# Altium PCB FilamentSupply.PcbDoc
Units mm, origin at the board's own origin, x right, y up, seen from the top; angles counter-clockwise.
Board outline 66 x 98.7 mm, 2 copper layers (Top Layer, Bottom Layer); 74 components, 46 nets, 190 pads, 37 vias.
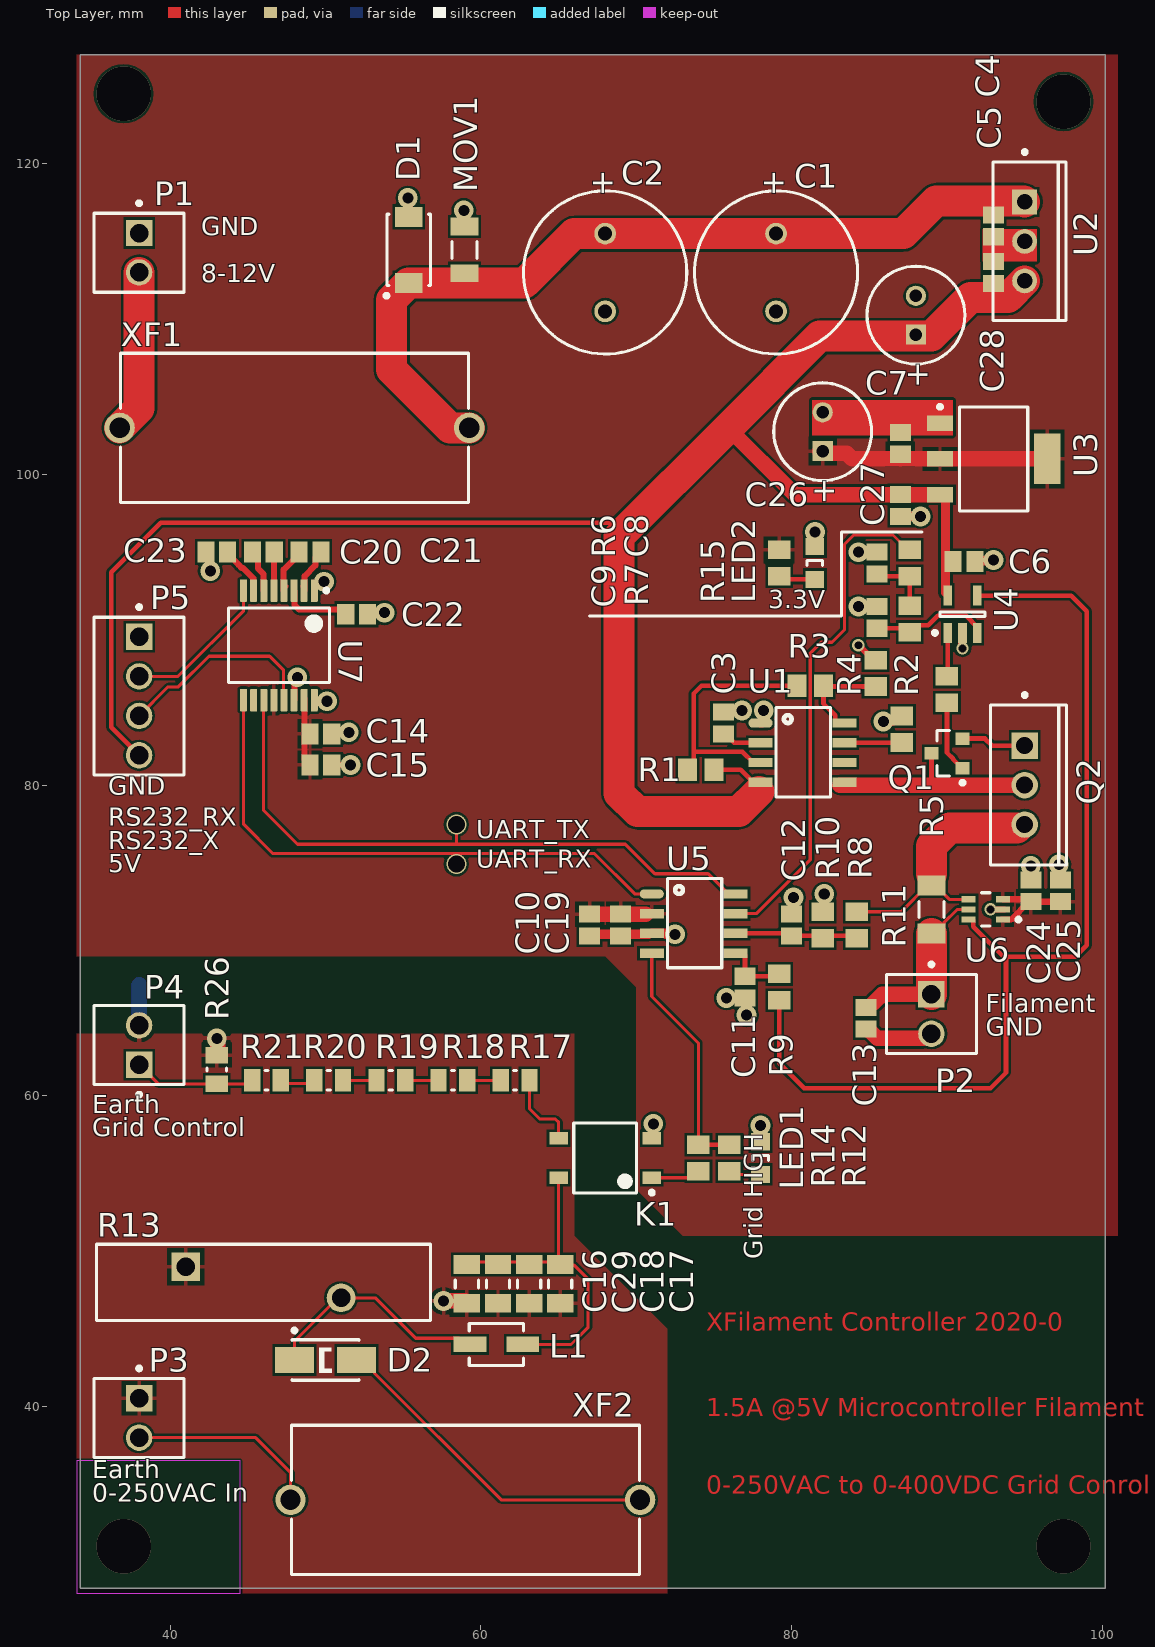
[diagram p0: Top Layer view]
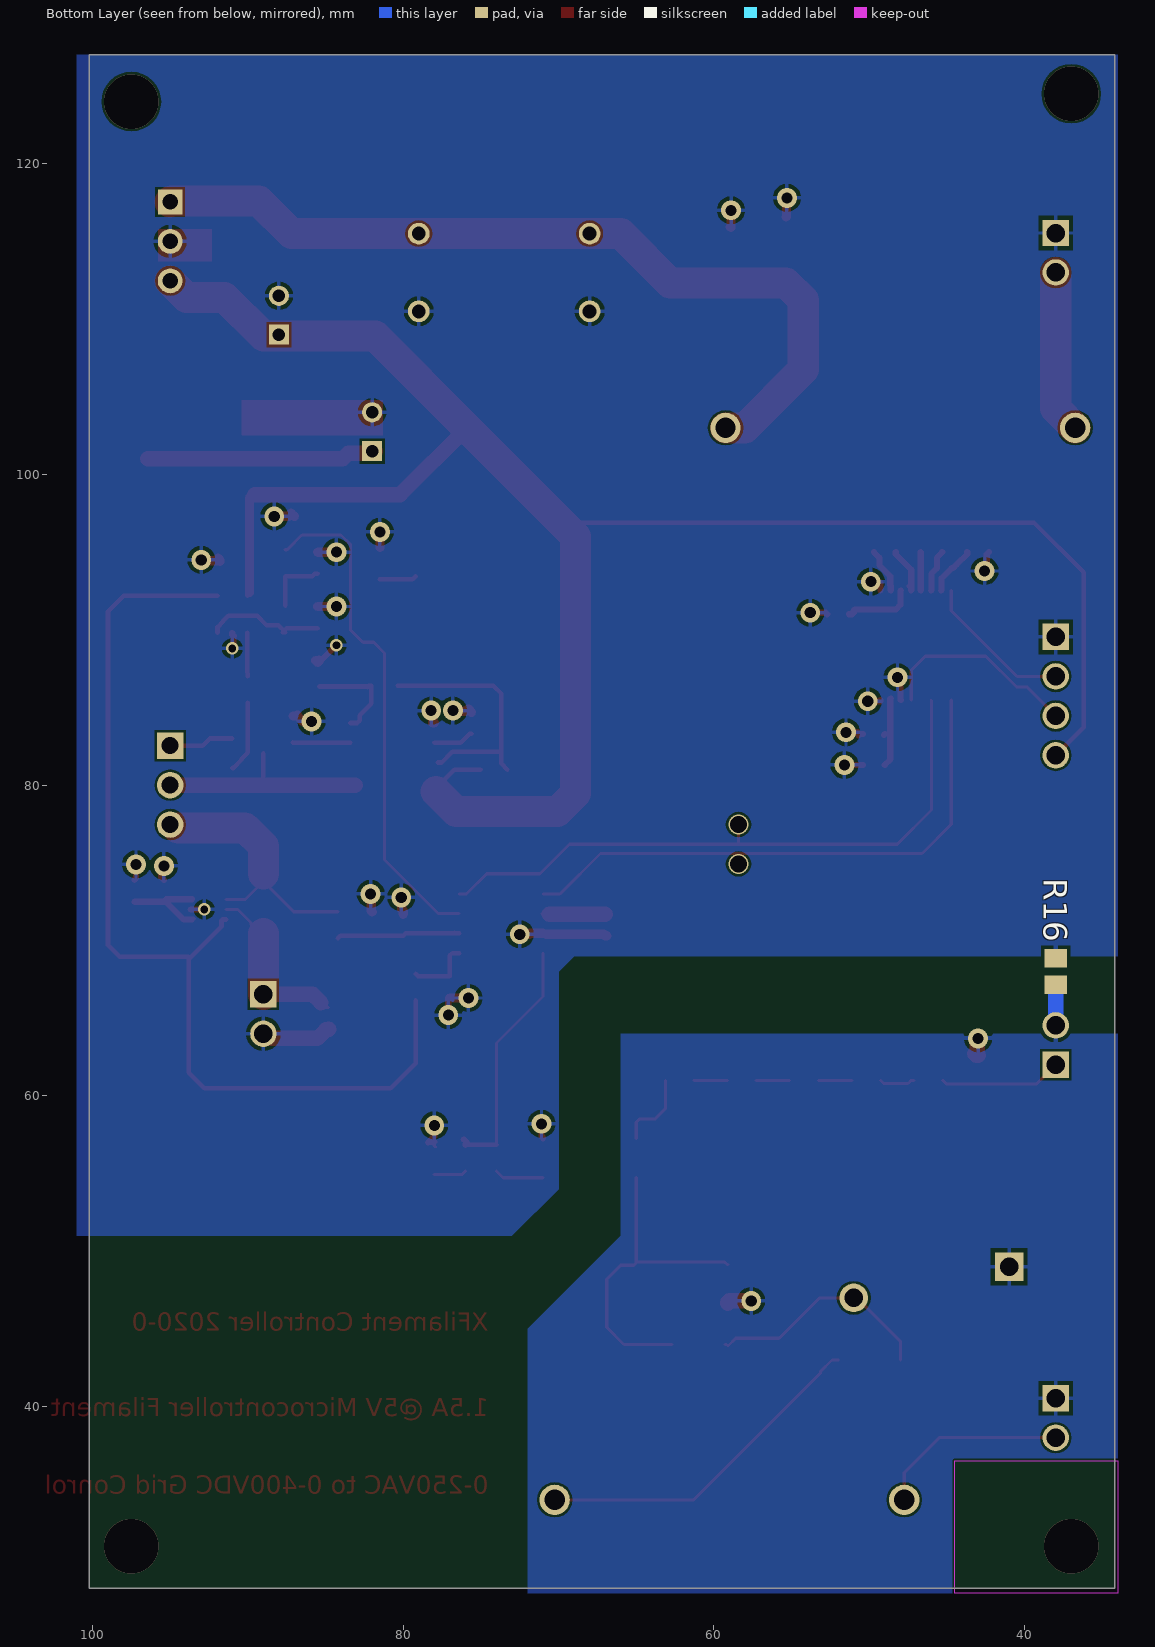
[diagram p1: Bottom Layer view, seen from below]

## Layer stack, top to bottom
Top Solder: solder mask 0.0102, Solder Resist, Dk 3.5
Top Layer: signal copper 0.0356
Dielectric 1: dielectric 0.32, FR-4, Dk 4.8
Bottom Layer: signal copper 0.0356
Bottom Solder: solder mask 0.0102, Solder Resist, Dk 3.5

## Board outline
34.2,28.3 100.2,28.3 100.2,127 34.2,127

## Design rules (kind name [scope] priority, off if disabled: settings)
Clearance [All] p1: gap=0.15 ignorepadtopadclearanceinfootprint=FALSE
PolygonConnect [All] p1: connectstyle=Relief reliefconductorwidth=0.254 reliefentries=4 polygonreliefangle="90 Angle" airgapwidth=0.254
RoutingVias [All] p1: holewidth=0.5 width=0.8 viastyle="Through Hole" minholewidth=0.3 minwidth=0.5 maxholewidth=10 maxwidth=20
SolderMaskExpansion [All] p1: expansion=0.102 istentingtop=FALSE
Width [All] p1: maxlimit=5 minlimit=0.15 preferedwidth=0.3
30 further rules are at their usual default settings.

## Components (designator, comment, footprint, x,y, rotation, side; value= is the part's Value field where it differs from the comment)
C1 "470uF 50V" PNSC-CAP-10x20-P2 79,113 r270 top
C2 "470uF 50V" PNSC-CAP-10x20-P2 68,113 r270 top
C3 "1uF" CAPC2013X145X50LL20T25 75.6,84 r270 top
C4 "0.1uF" CAPC2013X145X50LL20T25 93,116 r90 top
C5 "0.1uF" CAPC2013X145X50LL20T25 93,113 r270 top
C6 "0.1uF" CAPC2013X145X50LL20T25 91.1,94.4 r180 top
C7 "100uF 16V" CAPPR55-250-1120X630X1220 88,110.25 r90 top
C8 "1uF" CAPC2013X145X50LL20T25 85.5,94.3 r270 top
C9 "1uF" CAPC2013X145X50LL20T25 85.5,90.8 r270 top
C10 "10nF" CAPC2013X145X50LL20T25 67,71 r90 top
C11 "1uF" CAPC2013X145X50LL20T25 77,67 r90 top
C12 "1uF" CAPC2013X145X50LL20T25 80,71 r270 top
C13 "1uF" CAPC2013X145X50LL20T25 84.8,65 r90 top
C14 "0.1uF" CAPC2013X145X50LL20T25 49.7,83.3 r180 top
C15 "10nF" CAPC2013X145X50LL20T25 49.7,81.3 r180 top
C16 "20uF 50V X7R" CAPC3216X180X50LL20T30 59.1,47.9 r90 top
C17 "20uF 50V X7R" CAPC3216X180X50LL20T30 65.1,47.9 r90 top
C18 "20uF 50V X7R" CAPC3216X180X50LL20T30 63.1,47.9 r90 top
C19 "0.1uF" CAPC2013X145X50LL20T25 69,71 r90 top
C20 "0.1uF" CAPC2013X145X50LL20T25 46,95 r0 top
C21 "0.1uF" CAPC2013X145X50LL20T25 49,95 r0 top
C22 "0.1uF" CAPC2013X145X50LL20T25 52,91 r0 top
C23 "0.1uF" CAPC2013X145X50LL20T25 43,95 r0 top
C24 "0.1uF" CAPC2013X145X50LL20T25 95.4,73.2 r270 top
C25 "10nF" CAPC2013X145X50LL20T25 97.3,73.2 r270 top
C26 "100uF 16V" CAPPR55-250-1120X630X1220 82,102.75 r90 top
C27 "0.1uF" CAPC2013X145X50LL20T25 87,98 r90 top
C28 "0.1uF" CAPC2013X145X50LL20T25 87,102 r270 top
C29 "20uF 50V X7R" CAPC3216X180X50LL20T30 61.1,47.9 r90 top
D1 "P12 -- MBRAF360T3G" ONSC-SMA-FL-2-403AA-01_V 55.35,114.45 r90 top
D2 "S1M-13-F" DIOD-S1M-13-F-SMA-2_V 50,43 r180 top
K1 "ASSR-4118-503E" FP-SO-4-MFG 68,56 r180 top value=0.4pF
L1 "LQH32CN100K23L" FP-LQH32CN100K23L-MFG 61,44 r0 top value=10uH
LED1 "LED" 0805_A 78,56 r270 top
LED2 "LED" 0805_A 81.5,94.3 r270 top
MOV1 "MOV" CAPC1206(3216)100_N 58.95,114.45 r270 top value=100pF
P1 "22-27-2021" MOLX-22-27-2021_V 38,114.27 r270 top
P2 "22-27-2021" MOLX-22-27-2021_V 89,65.27 r270 top
P3 "22-27-2021" MOLX-22-27-2021_V 38,39.27 r270 top
P4 "22-27-2021" MOLX-22-27-2021_V 38,63.27 r90 top
P5 "22-27-2041" MOLX-22-27-2041_V 38,85.73 r90 top
Q1 "BC817-16LT1G" ONSC-SOT-23-3-318-08_V 90,82.05 r180 top
Q2 "BD243CG" ONSC-TO-220-3-221A-09 95,80 r0 top
R1 "30k" RESC2013X60X40NL20T25 74.15,81 r180 top
R2 "30k" RESC2013X60X40NL20T25 87.1,83.6 r90 top
R3 "30k" RESC2013X60X40NL20T25 81.2,86.4 r0 top
R4 "30k" RESC2013X60X40NL20T25 85.4,87.2 r90 top
R5 "100" RESC2013X60X40NL20T25 90,86.15 r90 top
R6 "30k" RESC2013X60X40NL20T25 87.6,94.3 r90 top
R7 "30k" RESC2013X60X40NL20T25 87.6,90.7 r90 top
R8 "30k" RESC2013X60X40NL20T25 84.2,71 r90 top
R9 "30k" RESC2013X60X40NL20T25 79.2,67 r270 top
R10 "30k" RESC2013X60X40NL20T25 82,71 r270 top
R11 "0.05R 35ppm" RESC3216X60X45ML10T20 89,72 r90 top
R12 "100" RESC2013X60X40NL20T25 74,56 r270 top
R13 "430V MOV" FP-B72220S0-MFG 46,48 r0 top value=9350pF
R14 "100" RESC2013X60X40NL20T25 76,56 r270 top
R15 "100" RESC2013X60X40NL20T25 79.2,94.3 r270 top
R16 "0" RESC2013X60X40NL20T25 38,68 r270 bottom
R17 "100k" RESC2013X50X30NL20T20 62.2,61 r180 top
R18 "100k" RESC2013X50X30NL20T20 58.2,61 r180 top
R19 "100k" RESC2013X50X30NL20T20 54.2,61 r180 top
R20 "100k" RESC2013X50X30NL20T20 50.2,61 r180 top
R21 "100k" RESC2013X50X30NL20T20 46.2,61 r180 top
R26 "4.7M" RESC2013X50X30NL20T20 43,61.7 r270 top
U1 "TPS25921ADR" SOIC8 78,84 r0 top
U2 "LM7805CT" FAIR-TO-220-3 95,115 r0 top
U3 "LT1117CST-3.3#PBF" LT-ST-3-SOT-223_M 93,101 r0 top
U4 "LTC6240HVCS5#TRMPBF" LT-S5-5-TSOT-23_N 91,91 r90 top
U5 "STM32G030J6M6" SOIC8 71,73 r0 top
U6 "INA213AIDCKT" FP-DCK0006A-MFG 92.5,72 r180 top
U7 "MAX3221IDBR" DB0016A_L 47,89 r270 top
XF1 "696103201002" 696103201002 48,103 r0 top
XF2 "696103201002" 696103201002 59,34 r0 top

## Footprints (in the part's own frame and the unit in brackets; to place one, negate y for a bottom-side part, rotate by r counter-clockwise, add the part's x,y. Pads: shape width x height; smd on the part's side, far side on the other; paste and mask are expansions set on the pad)
0805_A [mm] "Chip LED, 2-Leads, Body 2.0x1.3mm, IPC Medium Density"
  rect 1.1x1.2 smd: 1(-1.05,0) 2(1.05,0)
  silkscreen extent -0.15,-0.5 0.15,0.5, body extent -1,-0.62 1,0.63, height 0.68
696103201002 [mm] "FUSEHOLDER BLOCKS - PCB - CLIP COVER - THR"
  round 1.95 hole 1.3: 1(-11.25,0) 2(11.25,0)
  silkscreen extent -11.2,-4.8 11.2,4.8, body extent -12.05,-4.8 12.05,4.8, height 11.55
CAPC1206(3216)100_N [mm] "Chip Capacitor, Body 3.2x1.6mm, Height 1mm, IPC Medium Density"
  rect 1.15x1.8 smd: 1(-1.5,0) 2(1.5,0)
  silkscreen extent -0.55,-0.8 0.55,0.8, body extent -1.7,-0.9 1.7,0.9, height 1
CAPC2013X145X50LL20T25 [mm] "Chip Capacitor, 2-Leads, Body 2.00x1.25mm, IPC High Density"
  rect 1.1x1.35 smd: 1(-0.7,0) 2(0.7,0)
  body extent -1.1,-0.72 1.1,0.72, height 1.45
CAPC3216X180X50LL20T30 [mm] "Chip Capacitor, 2-Leads, Body 3.4x1.8mm, IPC High Density"
  rect 1.2x1.7 smd: 1(-1.25,0) 2(1.25,0)
  silkscreen extent -0.25,-0.75 0.25,0.75, body extent -1.7,-0.9 1.7,0.9, height 1.8
CAPPR55-250-1120X630X1220 [mm] "THD, 2-Leads, Dia 6.3mm, Body Length 11.2mm"
  rect 1.3x1.3 hole 0.8: 1(-1.25,0)
  round 1.3 hole 0.8: 2(1.25,0)
  silkscreen extent -3.15,-3.15 3.15,3.15, body extent -3.15,-3.15 3.16,3.15, height 12.21
DB0016A_L [mm] "SOP, 16-Leads, Body 5.6x6.5mm, Pitch 0.65mm, IPC High Density"
  rrect22% 1.45x0.45 smd: 1(-3.525,2.275) 2(-3.525,1.625) 3(-3.525,0.975) 4(-3.525,0.325) 5(-3.525,-0.325) 6(-3.525,-0.975) 7(-3.525,-1.625) 8(-3.525,-2.275) 9(3.525,-2.275) 10(3.525,-1.625) 11(3.525,-0.975) 12(3.525,-0.325) 13(3.525,0.325) 14(3.525,0.975) 15(3.525,1.625) 16(3.525,2.275)
  silkscreen extent -3.65,-3.25 2.4,3.25, body extent -3.91,-3.1 3.91,3.1, height 2
DIOD-S1M-13-F-SMA-2_V [mm] "SMD, 2-Leads, Body 4.3x2.605mm, Height 2.3mm"
  rect 2.5x1.7 smd: 1(-2,0) 2(2,0)
  silkscreen extent -2.15,-2.03 2.15,1.3, body extent -2.15,-1.3 2.15,1.3, height 2.3
FAIR-TO-220-3 [mm] "FM, 3-Leads, Body 10.2x4.7mm, Pitch 2.54mm"
  rect 1.6x1.6 hole 1: 1(0,2.54)
  round 1.6 hole 1: 2(0,0) 3(0,-2.54)
  silkscreen extent -2.04,-5.1 2.66,5.87, body extent -2.04,-5.1 2.66,5.1, height 18.95
FP-B72220S0-MFG [mm]
  rect 1.85x1.85 hole 1.2 paste-1000 mask+0: 1(-5,1)
  round 1.85 hole 1.2 paste-1000 mask+0: 2(5,-1)
  silkscreen extent -10.75,-2.45 10.75,2.45, body extent -10.85,-2.55 10.85,2.55, height 0.25
FP-DCK0006A-MFG [mm]
  rect 0.9x0.4 smd paste-1000 mask+0: 1(-1.1,0.65) 2(-1.1,0) 3(-1.1,-0.65) 4(1.1,-0.65) 5(1.1,0) 6(1.1,0.65)
  silkscreen extent -2.23,-1.07 0.27,1.07, body extent -1.65,-1.33 1.65,1.33, height 0.25
FP-LQH32CN100K23L-MFG [mm]
  rect 2.1x1 smd paste+0 mask+0: 1(-1.7,0) 2(1.7,0)
  silkscreen extent -1.75,-1.35 1.75,1.35, body extent -2.85,-1.45 2.85,1.45, height 0.25
FP-SO-4-MFG [mm]
  rect 1.2x0.8 smd paste+0 mask+0: 1(-3,1.27) 2(-3,-1.27) 3(3,-1.27) 4(3,1.27)
  silkscreen extent -3.13,-2.25 2.02,2.35, body extent -3.7,-2.35 3.7,2.35, height 0.25
LT-S5-5-TSOT-23_N [mm] "SOT23, 5-Leads, Body 2.90x1.63mm, Pitch 0.95mm, IPC Medium Density"
  rect 1.3x0.55 smd: 1(-1.2,0.95) 2(-1.2,0) 3(-1.2,-0.95) 4(1.2,-0.95) 5(1.2,0.95)
  silkscreen extent -1.32,-1.45 0.15,1.9, body extent -0.87,-1.45 0.87,1.45, height 1
LT-ST-3-SOT-223_M [mm] "SOT223, 4-Leads, Body 6.505x3.505mm, Pitch 2.3mm, IPC Low Density"
  rect 1.7x1 smd: 1(-3.45,2.3) 2(-3.45,0) 3(-3.45,-2.3)
  rect 1.7x3.25 smd: 4(3.45,0)
  silkscreen extent -3.57,-3.35 2.2,3.47, body extent -1.86,-3.35 1.86,3.35, height 1.8
MOLX-22-27-2021_V [mm] "Header, 2-Leads, Body 5.8x5.08mm"
  rect 1.7x1.7 hole 1.19: 1(-1.27,0)
  round 1.7 hole 1.19: 2(1.27,0)
  silkscreen extent -3.31,-2.9 2.54,2.9, body extent -2.54,-2.9 2.54,2.9, height 11.72
MOLX-22-27-2041_V [mm] "CONN, 4-Leads, Body 10.16x5.8mm, Pitch 2.54mm"
  rect 1.7x1.7 hole 1.19: 1(3.81,0)
  round 1.7 hole 1.19: 2(1.27,0) 3(-1.27,0) 4(-3.81,0)
  silkscreen extent -5.08,-2.9 5.85,2.9, body extent -5.08,-2.9 5.08,2.9, height 11.7
ONSC-SMA-FL-2-403AA-01_V [mm] "Molded, 2-Leads, Body 4.6x2.8mm"
  rect 1.3x1.76 smd: 1(-2.13,0) 2(2.13,0)
  silkscreen extent -3.07,-1.4 2.3,1.55, body extent -2.3,-1.4 2.3,1.4, height 1.1
ONSC-SOT-23-3-318-08_V [mm] "SOT23, 3-Leads, Body 2.92x1.3mm, Pitch 0.95mm"
  rect 0.9x0.8 smd: 1(-1,0.95) 2(-1,-0.95) 3(1,0)
  silkscreen extent -1.13,-1.46 0.65,2.02, body extent -0.65,-1.46 0.65,1.46, height 1.11
ONSC-TO-220-3-221A-09 [mm] "FM, 3-Leads, Body 10.3x4.85mm, Pitch 2.54mm"
  rect 1.7x1.7 hole 1.1: 1(0,2.54)
  round 1.7 hole 1.1: 2(0,0) 3(0,-2.54)
  silkscreen extent -2.2,-5.15 2.7,5.92, body extent -2.18,-5.15 2.67,5.15, height 19.85
PNSC-CAP-10x20-P2 [mm] "THD, 2-Leads, Dia 10.5mm, Body Length 22mm, Pin Spacing 5mm"
  round 1.4 hole 0.9: 1(-2.5,0) 2(2.5,0)
  silkscreen extent -5.25,-5.25 5.25,5.25, body extent -5.25,-5.25 5.25,5.25, height 22
RESC2013X50X30NL20T20 [mm] "Chip Resistor, 2-Leads, Body 2.00x1.25mm, IPC Medium Density"
  rect 1.05x1.45 smd: 1(-0.925,0) 2(0.925,0)
  silkscreen extent -0.1,-0.63 0.1,0.63, body extent -1.1,-0.72 1.1,0.72, height 0.5
RESC2013X60X40NL20T25 [mm] "Chip Resistor, 2-Leads, Body 2.00x1.25mm, IPC Medium Density"
  rect 1.2x1.45 smd: 1(-0.85,0) 2(0.85,0)
  body extent -1.1,-0.72 1.1,0.72, height 0.6
RESC3216X60X45ML10T20 [mm] "Chip Resistor, 2-Leads, Body 3.20x1.60mm, IPC Low Density"
  rect 1.3x1.8 smd: 1(-1.55,0) 2(1.55,0)
  silkscreen extent -0.5,-0.8 0.5,0.8, body extent -1.65,-0.85 1.65,0.85, height 0.6
SOIC8 [mm]
  oval 1.55x0.6 smd: 1(0,0)
  rect 1.55x0.6 smd: 2(0,-1.27) 3(0,-2.54) 4(0,-3.81) 5(5.4,-3.81) 6(5.4,-2.54) 7(5.4,-1.27) 8(5.4,0)
  silkscreen extent 1,-4.75 4.5,1

## Part data
C1 C2: library part CMP-2000-05308-1, "Aluminum Electrolytic Capacitor, 470 uF, +/- 20%, 50 V, -55 to 105 degC, 2-Pin THD, RoHS, Bulk", Capacitance=470µF, Case Size/Dimension=Ø10x20mm, Lifetime@Temperature=2000Hrs@105degC, Manufacturer=Panasonic, Operating Temp Range=-55to+105degC, Operating Temp-Max=105degC, Package Description="2-Pin Through Hole Device, Dia 10 mm, Body Length 20 mm, Pin Spacing 5 mm", Package Reference=CAP-10x20-P2, Package Version=Nov-12, Rated Voltage=50V, Ripple Current=530mA, Datasheet URL=http://www.alliedelec.com/images/products/datasheets/bm/Panasonic/70067776.pdf, Datasheet Version=Nov-12, Manufacturer URL=http://www.panasonic.com/, Package URL=http://www.alliedelec.com/images/products/datasheets/bm/Panasonic/70067776.pdf, Series=NHG, Type=Radial
C3 C4 C5 C6 C8 C9 C10 C11 C12 C13 C14 C15 C19 C20 C21 C22 C23 C24 C25 C27 C28: library part CMP-2007-01016-1, Manufacturer=Kemet, Part Number=C0805C105K4PACTU
C7 C26: library part CMP-1665-00015-4, "Aluminum Electrolytic Capacitor (Radial Lead Type), 100 uF, 35 V, -40 to 85 degC, 2-Pin THD, RoHS, Bulk", Manufacturer=Panasonic, Max Operating Temperature="85 degC", Min Operating Temperature="-40 degC", Package Quantity=200, Voltage rating="35 V", ComponentLink1Description="Manufacturer URL", ComponentLink1URL=http://www.panasonic.com/, ComponentLink2Description=Datasheet, ComponentLink2URL=http://industrial.panasonic.com/cdbs/www-data/pdf/RDF0000/ABA0000C1047.pdf, DatasheetVersion=03/2016, Height="11.2 mm", Lead Pitch="2.5 mm", Length="11.2 mm", Mount="Through Hole", Mounting Technology="Through Hole", PackageDescription="2-Pin Through Hole Device, Dia 6.3 mm, Body Length 11.2 mm", PackageReference=Radial, Packaging=Bulk, Pins=2, REACH SVHC="No SVHC", RoHSCompliant=true
C16 C17 C18 C29: library part CMP-2000-07530-1, "HighVoltaeCaps", Manufacturer="Samsung Electro-Mechanics", Package Description="2-Pin Surface Mount Device, Body 3.2 x 1.6 mm", Package Reference=1206, Datasheet URL=https://media.digikey.com/pdf/Data%20Sheets/Samsung%20PDFs/CL_Series_MLCC_ds.pdf, Datasheet Version=07/2008, Manufacturer URL=http://www.samsungsem.com/global/index.jsp, Mounting Technology=SurfaceMount
D1: library part CMP-1055-00332-1, "P12 -- Schottky Power Rectifier, 2-Pin SMA, Pb-Free, Tape and Reel", Manufacturer="On Semiconductor", PartNumber=MBRAF360T3G, ComponentLink1Description="Manufacturer URL", ComponentLink1URL=http://www.onsemi.com/, ComponentLink2Description=Datasheet, ComponentLink2URL=http://www.onsemi.cn/pub_link/Collateral/MBRAF360-D.PDF, ComponentLink3Description="Package Specification", ComponentLink3URL=http://www.onsemi.com/pub_link/Collateral/403AA.PDF, Configuration=Single, DatasheetVersion="Rev. 0", IFSM Max (A)=125, Mounting Technology="Surface Mount", Note1=0, PackageDescription="2-Pin Small Molded Package, Body 2.6 x 4.3 mm", PackageReference=SMA-FL-2-403AA-01, PackageVersion="Rev. O, 03/2011", Packing="Tape and Reel", RoHS=TRUE
D2: library part CMP-0639-00001-1, "Surface Mount Glass Passivated Rectifier, 1000V, 1 A, -65 to 125 degC, 2-Pin SMA Package, RoHS, Tape and Reel", Forward Voltage Drop VF (V)=1.1, Manufacturer="Diodes Inc", Maximum Average Rectified Current IO (A)=1, Maximum Peak Forward Surge Current IFSM (A)=30, Maximum Reverse Current IR (uA)=5, Operating Temperature Range="-65 to 150 degC", Peak Repetitive Reverse Voltage VRRM (V)=1000, Total Capacitance CT (pF)=10, ComponentLink1Description="Manufacturer URL", ComponentLink1URL=http://www.diodes.com/, ComponentLink2Description=Datasheet, ComponentLink2URL=http://diodes.com/datasheets/ds16003.pdf, ComponentLink3Description="Package Specification", ComponentLink3URL=http://diodes.com/datasheets/ds16003.pdf, DatasheetVersion="Rev. 22 - 2", Mounting Technology="Surface Mount", PackageDescription="2-Pin SMD, Body 4.3 x 2.605 mm, Height 2.3 mm", PackageReference=S1M-13-F-SMA-2, PackageVersion="Rev. 22 - 2", Packing="Tape and Reel", PartNumber=S1M-13-F, RoHS=TRUE
K1: library part CMP-18473-000001-1, "SSR RELAY SPST-NO 100MA 0-400V", Ambient Temperature Range High=+85°C, Ambient Temperature Range Low=-40°C, Capacitance=0.4pF, Input Current=25mA, Isolation Voltage=3750Vrms, Manufacturer=Broadcom, Manufacturer Part Number=ASSR-1218-503E, Max Junction Temp=+125°C, Max Surge Forward Current=50mA, On State Resistance=1Ω, Output Current=0.2A, Output Voltage=60V, Package=SO-4, Temperature="-40°C to +85°C", Automotive=No, Category=Relay, ComponentLink2Description=Datasheet, ComponentLink2URL=https://docs.broadcom.com/docs/AV02-0173EN, Device Class L1=Electromechanical, Device Class L2=Relays, Device Class L3="Solid State Relays", Digikey Description="SSR RELAY SPST-NO 200MA 0-60V", Height=2.404mm, Lead Free=Yes, Mouser Description="Solid State Relays - PCB Mount SSR(STD+1A) (60V 0.2A)", Number Of Contacts=1, Octopart=https://octopart.com/assr-1218-503e-broadcom-71127361, RoHS=TRUE, Standoff Height=0mm, Temperature Range High=+85°C, Temperature Range Low=-40°C, Throw Configuration=SPST-NO
L1: library part CMP-06042-000010-1, "FIXED IND 10UH 300MA 440 MOHM", Inductance=10uH, Manufacturer=Murata, Rms Current=300mA, Self Resonant Frequency=26MHz, Series Resistance=0.572Ω, Temperature="-40°C to +85°C", Temperature Range High=+85°C, Temperature Range Low=-40°C, Test Frequency=1MHz, Tolerance=10%, Automotive=No, Category=Ind, ComponentLink2Description=Datasheet, ComponentLink2URL=https://psearch.en.murata.com/inductor/product/LQH32CN100K23%23.html, Composition=Wirewound, Core Material=Ferrite, Device Class L1="Passive Components", Device Class L2=Inductors, Device Class L3="Fixed Inductors", Digikey Description="FIXED IND 10UH 300MA 440 MOHM", Footprint Url=https://search.murata.co.jp/Ceramy/image/img/P02/JELF243A-0039.pdf, Height=2.2mm, Lead Free=Yes, Manufacturer Part Number=LQH32CN100K23L, Octopart=https://octopart.com/lqh32cn100k23l-murata-387507, Package=LQH32CN100K23L, RoHS=TRUE
LED1 LED2: library part CMP-1426-00010-1, "SMD mono-color Chip LED, WL-SMCW, Super Red", Color="Super Red", Manufacturer="Wuerth Elektronik", PartNumber=150080SS75000, ComponentLink1Description="Manufacturer URL", ComponentLink1URL=http://www.we-online.com, ComponentLink2Description=Datasheet, ComponentLink2URL=http://katalog.we-online.com/led/datasheet/150080SS75000.pdf, PackageReference=0805_A
MOV1: library part CMP-1037-01594-1, Case-EIA=1206, Case-Metric=3216, Rated Voltage="200 V", Tolerance=Â±10%, Max Thickness="1 mm", Technology=SMT
P1 P2 P3 P4: library part CMP-2000-05537-1, "Male Header, Pitch 2.54 mm, 1 x 2 Position, Height 11.7 mm, Tail Length 3.56 mm, 0 to 75 degC, RoHS, Bulk", Current - Max=4A, Manufacturer=Molex, Operating temperature=0°Cto+75°C, Package Description="2-Leads Header, Body 5.08 x 5.8 mm, Pitch 2.54 mm", Package Version="Rev. BC, 02/2012", PartNumber=0022272021, Voltage - Max=250V, Contact material=Tinplatedbrass, Current rating=4A, Datasheet URL=http://www.molex.com/pdm_docs/sd/022272021_sd.pdf, Datasheet Version="Rev. F, 06/2009", Housing material=Nylon(UL94V-0), Manufacturer URL=http://www.molex.com/, Mounting Technology=ThroughHole, No. of Positions=2, No. of Rows=1, Orientation=Vertical, Package Reference=22-27-2021, Pitch=2.54mm, Voltage rating=250V
P5: library part CMP-2000-05243-1, "Male Header, Pitch 2.54 mm, 1 x 4 Position, Height 11.7 mm, Tail Length 3.56 mm, RoHS, Bulk", Current rating=4A, Manufacturer=Molex, Operating temperature=0degCto+75degC, Voltage rating=250V, Contact material=Tinplatedbrass, Datasheet URL=http://www.molex.com/pdm_docs/sd/022272041_sd.pdf, Datasheet Version="Rev. F, 06/2009", Housing material=Nylon(UL94V-0), Manufacturer URL=http://www.molex.com/
Q1: library part CMP-1048-00736-1, "General Purpose Transistor, NPN Silicon, 3-Pin SOT-23, Pb-Free, Tape and Reel", Manufacturer="On Semiconductor", ComponentLink1Description="Manufacturer URL", ComponentLink1URL=http://www.onsemi.com/, ComponentLink2Description=Datasheet, ComponentLink2URL=http://www.onsemi.com/pub_link/Collateral/BC817-16LT1-D.PDF, ComponentLink3Description="Package Specification", ComponentLink3URL=http://www.onsemi.cn/pub_link/Collateral/318-08.PDF, DatasheetVersion="Rev. 12", fT Min (MHz)=100, IC Continuous (A)=0.5, Mounting Technology="Surface Mount", PackageDescription="3-Pin Small Outline Transistor, Body 2.92 x 1.3 mm, Pitch 0.95 mm", PackageReference=SOT-23-3-318-08, PackageVersion="Rev. AP, 11/2009", Packing="Tape and Reel", PartNumber=BC817-16LT1G, Polarity=NPN, RoHS=TRUE
Q2: library part CMP-1048-01147-1, "Complementary Silicon Plastic Power Transistor, 3-Pin TO-220, Pb-Free, Tube", Manufacturer="On Semiconductor", ComponentLink1Description="Manufacturer URL", ComponentLink1URL=http://www.onsemi.com/, ComponentLink2Description=Datasheet, ComponentLink2URL=http://www.onsemi.com/pub_link/Collateral/BD243B-D.PDF, ComponentLink3Description="Package Specification", ComponentLink3URL=http://www.onsemi.com/pub_link/Collateral/221A-09.PDF, DatasheetVersion="Rev. 14", fT Min (MHz)=3, IC Continuous (A)=6, Mounting Technology="Through Hole", PackageDescription="3-Pin Flange Mount, Vertical Straight Lead, Body 9.97 x 4.445 mm, Pitch 2.54 mm", PackageReference=TO-220-3-221A-09, PackageVersion="Rev. AG, 09/2011", Packing=Tube, PartNumber=BD243CG, Polarity=NPN, RoHS=TRUE
R1 R2 R3 R4 R5 R6 R7 R8 R9 R10 R12 R14 R15 R16: library part CMP-2001-00626-1, Manufacturer=Panasonic, Part Number=ERA-6AEB303V
R11: library part CMP-2003-02088-1, Manufacturer="Vishay Dale", Part Number=CRCW120630R1FKEA
R13: library part CMP-10618-000002-1, "430V MOB", Capacitance=9350pF, Clamping Current=20A, Clamping Voltage=93V, Manufacturer=EPCOS, Manufacturer Part Number=B72220S0300K101, Package=B72220S0, Temperature="-40°C to +105°C", Temperature Range High=+105°C, Temperature Range Low=-40°C, Varistor Voltage=47V, Voltage Rating Ac=30V, Voltage Rating DC=38V, Voltage Tolerance=10%, Automotive=No, Category=Res, ComponentLink2Description=Datasheet, ComponentLink2URL=https://www.tdk-electronics.tdk.com/inf/70/db/var/SIOV_Leaded_StandarD.pdf, Device Class L1="Circuit Protection", Device Class L2=Varistors, Device Class L3=unset, Digikey Description="VARISTOR 47V 2KA DISC 20MM", Height=25.5mm, Lead Free=Yes, Mouser Description="Epcos Standard Series Metal Oxide Varistor 9.35nF 20A; Clamping 93V; Varistor 47V", Octopart=https://octopart.com/b72220s0300k101-epcos-10532994, RoHS=TRUE
R17 R18 R19 R20 R21 R26: library part CMP-2001-03930-1, Manufacturer="Vishay Dale", Part Number=CRCW0805470KFKEA
U1: "Electronic Fuse Regulator 1.7A 8-SOIC"
U2: library part CMP-2000-04938-1, "Positive Voltage Regulator, 5 V, 1 A, -40 to 125 degC, 3-Pin TO-220, RoHS, Tube", Manufacturer=FairchildSemiconductor, Maximum Input Voltage=35V, Maximum Output Current=2.2(Typ)A, Maximum Quiescent Current=8mA, Operating temperature=-40to125degC, Output Voltage=5V, Package=3TO-220AB, Package Description="3-Pin Through Hole Device, Body 10 x 4.5 mm, Pitch 2.54 mm", Package Reference=TO-220, Typical Dropout Voltage @ Current=2@1AV, Accuracy=±4%, Category=LinearRegulator, Datasheet URL=https://datasheet.ciiva.com/26904/lm7805ct-26904988.pdf, Datasheet Version=Aug-12, Line Regulation=100mV, Load Regulation=100mV, Manufacturer URL=https://www.fairchildsemi.com/, Mounting=ThroughHole, Number of Outputs=1, Output Type=Fixed, Package URL=https://www.fairchildsemi.com/package-drawings/TO/TO220B03.pdf, Packaging=Rail/Tube, Polarity=Positive, Rad Hard=No, Type=Linear
U3: library part CMP-0476-01810-1, "0.8 A Low Dropout Positive Regulator, 2.45 to 15 V Vin, 3.3 V Vout, 3-pin SOT223 (ST-3), 0 to 125 degC, Pb-Free", Dropout Voltage(V)=1.1, Manufacturer="Linear Technology", Output Voltage="3.3 V", ComponentLink1Description="Manufacturer URL", ComponentLink1URL=http://www.linear.com/, ComponentLink2Description=Datasheet, ComponentLink2URL=http://cds.linear.com/docs/en/datasheet/1117fd.pdf, ComponentLink3Description="Package Specification", ComponentLink3URL=http://cds.linear.com/docs/en/packaging/SOT_3_05-08-1630.pdf, DatasheetVersion="Rev. D", Discrete Pass Element=no, Iout(mA)=800, Isupply(mA)=5, Mounting Technology="Surface Mount", Number of Outputs=1, PackageDescription="3-Pin Plastic SOT-223, 3.505 x 6.505 mm Body, Pitch 2.3 mm", PackageReference=ST-3, PackageVersion=Jun-10, PartNumber=LT1117CST-3.3#PBF, PSRR(dB)=75, RoHS=TRUE, Vin Max(V)=15, Vin Min(V)=2.45
U4: library part CMP-0359-01964-2, "Single Channel, Low Noise, CMOS Operational Amplifier, RRO, 18 MHz Typical GBW, 10 V/us Typical SR, 2.8 to 12 V, 5-Pin SOT23 (S5-5), Commercial, Pb-Free, Mini Reel", Linear Technology Part Number=LTC6240HV, Manufacturer="Linear Technology", Channels (#)=1, Code_JEDEC=MO-193, ComponentLink1Description="Manufacturer URL", ComponentLink1URL=http://www.linear.com/, ComponentLink2Description=Datasheet, ComponentLink2URL=http://cds.linear.com/docs/en/datasheet/624012fe.pdf, ComponentLink3Description="Package Specification", ComponentLink3URL=http://cds.linear.com/docs/en/packaging/SOT_5_05-08-1635.pdf, DatasheetVersion="Rev. E", GBW (MHz) Typical=18, Is (mA) Typical=2, Mounting Technology="Surface Mount", PackageDescription="5-Lead Plastic TSOT-23, Body 1.63 x 2.90 mm, Pitch 0.95 mm", PackageReference=LT-S5-5-TSOT-23, Packing="Mini Reel", PartNumber=LTC6240HVCS5#TRMPBF, RevisionNote="URLs updated", RoHS=Pb-Free, SR (V/us) Typical=10, Type=VFB, Vos (mV) Typical=0.04, Vs Max (V)=12, Vs Min (V)=2.8
U6: library part CMP-04895-000035-1, "IC CURR SENSE 1 CIRCUIT SC70-6", Ambient Temperature Range High=+125°C, Ambient Temperature Range Low=-40°C, Input Bias Current=35uA, Manufacturer="Texas Instruments", Max Junction Temp=+150°C, Max Supply Voltage=26V, Min Supply Voltage=2.7V, Nominal Supply Current=100uA, Package=DCK0006A, Temperature="-40°C to +125°C", Automotive=No, Category=IC, ComponentLink2Description=Datasheet, ComponentLink2URL=http://www.ti.com/lit/ds/symlink/ina211.pdf, Device Class L1="Integrated Circuits (ICs)", Device Class L2="Linear ICs", Device Class L3="Amplifiers - Op Amps", Digikey Description="IC CURR SENSE 1 CIRCUIT SC70-6", Gain Bandwidth=80kHz, Height=0.8mm, Lead Free=Yes, Manufacturer Part Number=INA213AIDCKT, Mouser Description="SP Amp Current Shunt Monitor Single 26V 6-Pin SC-70 T/R", Number of Channels=1, Octopart=https://octopart.com/ina213aidckt-texas+instruments-7767892, RoHS=TRUE, Standoff Height=0mm, Temperature Range High=+125°C, Temperature Range Low=-40°C
U7: library part CMP-0299-01333-2, "3-V to 5.5-V Single-Channel RS-232 Line Driver / Receiver with ±15-kV ESD Protection, -40 to 85 degC, 16-Pin SSOP (DB), Green (RoHS & no Sb/Br)", Drivers Per Package=1, Supply Voltage(s)(V)="3.3 or 5.0", ComponentLink1Description="Manufacturer URL", ComponentLink1URL=www.ti.com, ComponentLink2Description=Datasheet, ComponentLink2URL=http://www.ti.com/general/docs/lit/getliterature.tsp?genericPartNumber=MAX3221&fileType=pdf, ComponentLink3Description="Package Specification", ComponentLink3URL=http://www.ti.com/litv/pdf/msso002e, DatasheetVersion=SLLS348M, ESD HBM(kV)=+/-15, ICC(Max)(mA)=1, PackageDescription="16-Pin Plastic Small Outline Package, 6.2 x 5.3 mm Body, 0.65 mm Pitch", PackageReference=DB0016A, PackageVersion="revE, Dec-2001", Receivers Per Package=1, RS-232=TRUE, Single Supply=TRUE, SubFamily=RS-232
XF1 XF2: library part CMP-1502-00239-1, "WR-FSH Fuse Holder Blocks Fuse Holder Blocks Clip Cover for PCB - THR Version", Manufacturer="Wurth Elektronik", Operating temperature=-30to120degC, Datasheet URL=https://katalog.we-online.de/em/datasheet/696103201002.pdf, Fuse Size=5x20mm, Manufacturer URL=http://www.we-online.de, Mounting Technology=THR, Package Reference=696103201002, Packaging=Box, Part Number=696103201002, Publisher=WurthElektronik

## Via types
v1: diameter 1.27, hole 0.711, Top Layer to Bottom Layer, tented both sides, 26 vias
v2: diameter 3.5, hole 3.5, Top Layer to Bottom Layer, 4 vias
v3: diameter 1.3, hole 1.1, Top Layer to Bottom Layer, 2 vias
v4: diameter 0.8, hole 0.5, Top Layer to Bottom Layer, tented both sides, 2 vias
v5: diameter 1.27, hole 0.711, Top Layer to Bottom Layer, 2 vias
v6: diameter 0.8, hole 0.5, Top Layer to Bottom Layer, 1 vias

## Nets (pads, with @x,y where several pads share a name; then routed paths per layer and width w, separated by ;. In a path a pad name is that pad's centre, name@x,y a point inside that pad or via, vN(x,y) a via of type N, cw(c..) or ccw(c..) an arc to the next point about the centre after c; other vN are vias at no path point)
3.3V: C10.2 C14.2 C15.2 C19.2 C24.2 C25.2 C26.1 C28.2 R15.1 U3.2 U3.4 U5.2 U6.1 U6.3 U7.12 U7.15 | length 29.8
  Top Layer w0.2: U7.15@48.6,85.6 48.625,85.575 U7.15 ; C26.1@81.6,101.1 C26.1@81.6,101.3
  Top Layer w0.3: U5.2@70.7,71.8 70.77,71.73 U5.2 ; U6.1@93.5,71.4 93.55,71.35 U6.1
  Top Layer w0.4: U7.15@48.625,85.575 48.65,85.55 48.65,81.65 C15.2 ; C14.2 C14.2@49.05,83.25 ; U6.1 94.125,71.35 95.275,72.5 C24.2 ; U6.3 95.25,72.65 C24.2 ; C25.2 C24.2
  Top Layer w1: C10.2 C19.2 U5.2@70.6,71.7 ; C26.1@81.8,101.5 C26.1 82.15,101.35 83.55,101.35 83.9,101 U3.2 U3.4
5V: C5.2 C6.2 C7.1 C27.2 P5.4 R1.1 U1.4 U2.3 U3.3 U4.5 | length 131.8
  Top Layer w0.3: P5.4 36.2,83.72 36.2,93.7 39.4,96.9 68.9,96.9 69.35,96.45 ; R1.1 76.715,81 U1.4@77.525,80.19 ; U4.5@89.9,92.4 89.925,92.4 90.05,92.275 U4.5
  Top Layer w0.6: U3.3 89.7,98.7 89.9,98.5 U4.5@89.9,92.4
  Top Layer w1: 75.9,103 80.2,98.7 C27.2 U3.3
  Top Layer w2: 77.9,79.6 76.6,78.3 70.072,78.3 68.9,79.472 68.9,96 75.9,103 81.8,108.9 89,108.9 91.5,111.4 93.94,111.4 U2.3
232_RX: P5.2 U7.8 | length 9.8
  Top Layer w0.2: P5.2 40.5,87 44.725,91.225 U7.8
232_TX: P5.3 U7.13 | length 13.2
  Top Layer w0.2: P5.3 39.864,86.324 40.524,86.324 42.5,88.3 46.4,88.3 47.3,87.4 47.3,85.5 U7.13
A_FEDB: R9.2 U4.4 U6.6 | length 65.3
  Top Layer w0.3: R9.2 79.2,62.1 80.8,60.5 92.8,60.5 93.8,61.5 93.8,68.95 98.25,68.95 99,69.7 99,91.2 98,92.2 U4.4 ; U6.6 91.65,71.35 91.7,71.3 91.7,70.9 93.8,68.8
A_FEDB_F: C11.2 R9.1 U5.5 | length 4.3
  Top Layer w0.3: U5.5 76.85,69.19 77,69.04 C11.2 79.05,67.7 R9.1
ENUV: R1.2 R3.1 U1.3 | length 16.3
  Top Layer w0.3: R1.2 73.7,81.4 73.7,82.15 ; U1.3@77.77,81.46 77.525,81.46 76.835,82.15 73.7,82.15 ; R3.1 74.2,86.4 73.7,85.9 73.7,82.15
GND: C1.2 C2.2 C3.1 C4.1 C5.1 C6.1 C7.2 C8.1 C9.1 C10.1 C11.1 C12.1 C13.1 C14.1 C15.1 C19.1 C22.2 C23.1 C24.1 C25.1 C26.2 C27.1 C28.1 D1.2 K1.2 LED1.1 LED2.1 MOV1.1 P1.1 P2.2 P5.1 R2.2 R4.2 R10.1 R16.1 U1.1 U2.2 U3.1 U4.2 U5.3 U6.2 U7.1 U7.14 U7.16 | length 45.8
  Top Layer w0.2: U5.3@70.8,70.4 70.86,70.46 U5.3 ; LED1.1@77.9,56.7 78,56.8 LED1.1
  Top Layer w0.4: C23.1 42.441,94.859 42.441,93.924 v1(42.582,93.783) ; U7.14 48,85.5 48,86.521 48.186,86.707 v1(48.186,86.942) ; U7.16 49.275,85.425 49.3,85.4 v1(50.1,85.4) ; U7.1 49.275,92.775 49.3,92.8 49.3,93.05 49.85,93.05 v1(49.9,93.1) ; C15.1 v1(51.6,81.3) ; C14.1 50.6,83.3 50.7,83.2 50.7,83.35 50.75,83.4 v1(51.5,83.4) ; C22.2 52.8,91.1 v1(53.8,91.1) ; K1.2 71,57.3 71.1,57.4 v1(71.1,58.2) ; C11.1 77.1,66.2 v1(77.1,65.2) ; LED1.1 LED1.1@78.35,57.05 ; v1(78,58.1) 78,57.4 LED1.1@78.35,57.05 ; v6(84.3,89) 84.325,89 85.275,88.05 R4.2 ; v4(91,88.8) 90.923,88.877 90.923,89.577 90.9,89.6 90.925,89.6 91,89.675 U4.2 ; v4(92.8,72) U6.2 U6.2@93.7,72 ; C24.1 95.6,74.1 95.6,74.6 v1(95.4,74.8) ; v1(97.2,74.9) 97.2,74 C25.1 ; LED1.1@78.35,57.05 78.4,57 LED1.1@78.35,57.05
  Top Layer w0.6: v1(55.3,117.8) 55.325,117.775 55.325,116.605 D1.2 ; v1(58.9,117) 58.9,115.9 MOV1.1 ; C10.1@66.9,70.3 C10.1 67.1,70.4 U5.3@70.8,70.4 ; U5.3 71.84,70.46 71.9,70.4 v1(72.5,70.4) ; C3.1 75.8,84.9 75.95,84.75 76.75,84.75 v1(76.8,84.8) ; v1(75.8,66.3) C11.1 ; U1.1 78.1,84 78.1,84.7 v1(78.2,84.8) ; C12.1 80,71.9 80.1,72 80.1,72.748 v1(80.126,72.774) ; LED2.1 81.5,95.3 v1(81.5,96.3) ; R10.1 82.05,71.9 82.05,72.95 v1(82.1,73) ; v1(84.3,91.5) C9.1 ; v1(84.3,95) C8.1 ; R4.2 85.4,88 85.5,87.9 R4.2@85.625,88.025 ; v1(85.9,84.1) 86.45,84.1 86.85,84.5 86.8,84.5 86.85,84.45 R2.2 ; C27.1 87.2,97.5 87.2,97.475 87.375,97.3 v1(88.3,97.3) ; U3.1@89.3,103.4 89.4,103.3 U3.1 ; C6.1 91.8,94.5 91.9,94.6 92.05,94.45 92.95,94.45 v1(93,94.5)
  Top Layer w1: C13.1 84.85,64.25 84.975,64.25 85.525,63.7 88.511,63.7 88.811,64 P2.2
  Bottom Layer w0.4: v1(42.582,93.783) v1@42.599,93.8 ; v1(48.186,86.942) 48.3,86.828 v1@48.3,86.6
  Bottom Layer w0.6: v1@80.1,72.8 v1(80.126,72.774)
GRID: R12.1 R14.1 U5.4 | length 16.1
  Top Layer w0.2: U5.4 71,66.4 74,63.4 R12.1
  Top Layer w0.3: R12.1 R14.1
  Top Layer w0.4: R14.1 76,56.9 75.9,57 R14.1@76.1,57.2
HGND: C16.1 C17.1 C18.1 C29.1 P3.1 P4.2 R13.1 R16.2 R26.1 | length 5.5
  Top Layer w1: R26.1 43.125,62.625 43.2,62.7 43.052,62.848 43.052,63.648 v5(43,63.7) ; v5(57.6,46.8) 59,46.8 59.1,46.7 C16.1
  Bottom Layer w1: P4.2 R16.2
NetC8_2: C8.2 R6.1 R7.2 | length 4.1
  Top Layer w0.3: C8.2 85.7,93.6 85.85,93.45 R6.1 R7.2
NetC13_2: C13.2 P2.1 R11.1 U6.5 | length 11.6
  Top Layer w0.2: C13.2 85,65.7 C13.2@85.3,66 ; R11.1 89.25,70.45 89.8,71 89.8,71.15 90.65,72 U6.5
  Top Layer w1: C13.2@85.3,66 85.84,66.54 P2.1
  Top Layer w2: P2.1 R11.1
NetC16_2: C16.2 C17.2 C18.2 C29.2 K1.4 L1.2 | length 21.6
  Top Layer w0.2: C16.2 59.15,49.15 59.3,49.3 64.95,49.3 C17.2@65,49.25 ; L1.2 65.8,44 66.9,45.1 66.9,48.2 66,49.1 65.15,49.1 C17.2 C17.2@65,49.25 ; K1.4 C17.2@65,49.25
NetC20_1: C20.1 U7.6 | length 2.8
  Top Layer w0.4: C20.1 45.65,94.65 45.65,93.95 46,93.6 46,92.55 U7.6
NetC20_2: C20.2 U7.5 | length 2.5
  Top Layer w0.4: U7.5 46.688,92.537 46.688,94.988 C20.2
NetC21_1: C21.1 U7.4 | length 3.2
  Top Layer w0.4: U7.4@47.4,92.8 47.35,92.8 47.325,92.775 U7.4 47.3,92.55 47.3,93.875 48.3,94.875 C21.1
NetC21_2: C21.2 U7.2 | length 2.9
  Top Layer w0.4: U7.2 48.625,92.775 48.6,92.8 48.65,92.85 48.65,93.45 49.35,94.15 49.35,94.65 C21.2
NetC22_1: C22.1 U7.3 | length 4.6
  Top Layer w0.4: U7.3 48,92.5 48,91.6 48.3,91.3 50.95,91.3 51,91.25 51,91.1 51.1,91 C22.1
NetC23_2: C23.2 U7.7 | length 3.2
  Top Layer w0.4: C23.2 43.7,94.875 44.4,94.175 44.405,94.175 44.605,93.975 44.691,93.975 45.35,93.316 45.35,92.55 U7.7
NetD2_1: D2.1 XF2.2 | length 22
  Top Layer w0.2: D2.1 52.4,43 53.15,42.25 53.15,42.15 61.3,34 XF2.2
NetD2_2: D2.2 L1.1 R13.2 | length 15
  Top Layer w0.2: D2.2 48,44.2 50.8,47 R13.2 53.2,47 55.8,44.4 58.6,44.4 59.1,43.9 59.2,44 L1.1
NetK1_1: K1.1 R12.2 | length 3.2
  Top Layer w0.2: K1.1 73.58,54.73 R12.2
NetK1_3: K1.3 R17.1 | length 5.1
  Top Layer w0.2: R17.1 63.125,59.175 63.8,58.5 64.8,58.5 65,58.3 K1.3
NetLED1_2: LED1.2 R14.2 | length 2.1
  Top Layer w0.2: R14.2 76.2,54.95 LED1.2
NetLED2_2: LED2.2 R15.2 | length 2.4
  Top Layer w0.3: R15.2 79.4,93.25 LED2.2
NetP1_2: P1.2 XF1.1 | length 10.5
  Top Layer w2: XF1.1 38,104.25 P1.2
NetP3_2: P3.2 XF2.1 | length 12.4
  Top Layer w0.2: P3.2 45.5,38 47.75,35.75 XF2.1
NetP4_1: P4.1 R21.2 R26.2 | length 8.2
  Top Layer w0.2: P4.1@38.2,62.2 P4.1 39.225,60.775 R26.2 45.05,60.775 R21.2
NetQ1_1: Q1.1 R5.1 | length 4.6
  Top Layer w0.3: R5.1 90,82.1 90.4,81.7 90.4,81.65 90.95,81.1 Q1.1
NetQ1_2: Q1.2 Q2.1 | length 4.2
  Top Layer w0.3: Q1.2 92.445,83 92.905,82.54 Q2.1
NetQ1_3: Q1.3 Q2.2 U1.5 | length 14
  Top Layer w0.3: 88.9,80 89,80.1 Q1.3
  Top Layer w1: U1.5@83.1,80 88.9,80 Q2.2
NetQ2_3: Q2.3 R8.2 R11.2 U6.4 | length 16.6
  Top Layer w0.2: R8.2 87.05,71.85 88.75,73.55 R11.2 89.25,73.55 90.15,72.65 U6.4
  Top Layer w0.3: Q2.3@94.5,77.25 94.71,77.46 Q2.3
  Top Layer w2: 89,74.281 89,76.078 90.172,77.25 Q2.3@94.5,77.25
NetR2_1: R2.1 U1.7 | length 3.7
  Top Layer w0.3: U1.7 87.08,82.73 R2.1
NetR5_2: R5.2 U4.1 | length 2.8
  Top Layer w0.3: R5.2 90,87.2 90.05,87.25 U4.1
NetR17_2: R17.2 R18.1 | length 2.2
  Top Layer w0.2: R18.1 60.4,61 R17.2
NetR18_2: R18.2 R19.1 | length 2.2
  Top Layer w0.2: R19.1 R18.2
NetR19_2: R19.2 R20.1 | length 2.1
  Top Layer w0.2: R20.1 R19.2
NetR20_2: R20.2 R21.1 | length 2.3
  Top Layer w0.2: R21.1 47.3,61 47.5,60.8 49.075,60.8 R20.2
OVP: R3.2 R4.1 U1.8 | length 6.6
  Top Layer w0.3: U1.8 82.95,84 82.8,84.15 82.8,84.5 82.05,85.25 R3.2 82.2,86.4 82.3,86.3 82.35,86.35 R4.1
PWM_ADC: R6.2 U5.7 | length 32.7
  Top Layer w0.2: U5.7 77.73,71.73 81.2,75.2 81.2,88.5 81.9,89.2 82.6,89.2 83.4,90 83.4,95.5 84,96.1 86.525,96.1 87.475,95.15 R6.2
RX_I: U5.1 U7.9 | length 36.1
  Top Layer w0.2: U7.9 44.725,77.475 46.6,75.6 56.4,75.6 67.3,75.6 69.9,73 U5.1
  other v3: 58.42,74.93
SET_I: C9.2 R7.1 U4.3 | length 7.9
  Top Layer w0.3: C9.2 87.5,90.1 R7.1@87.675,89.925 ; R7.1 87.75,89.85 R7.1@87.675,89.925 ; U4.3 91.95,90.175 91.575,90.55 91.575,90.574 91.249,90.9 89.4,90.9 88.8,90.3 88.05,90.3 R7.1@87.675,89.925
SS: C3.2 U1.2 | length 2.6
  Top Layer w0.3: C3.2 75.725,83.3 76.295,82.73 U1.2
TX_I: U5.8 U7.11 | length 41
  Top Layer w0.2: U7.11 46,85.45 46,78.4 48.2,76.2 58.42,76.2 ; v3(58.42,77.47) 58.42,76.2 ; U5.8 75.925,73 74.625,74.3 71.2,74.3 69.3,76.2 58.42,76.2
V_SENSE: C12.2 R8.1 R10.2 U5.6 | length 8
  Top Layer w0.3: U5.6 76.66,70.46 76.7,70.5 76.74,70.46 79.84,70.46 C12.2 84.05,70.3 R8.1
VIN_F: C1.1 C2.1 C4.2 D1.1 MOV1.2 U2.1 XF1.2 | length 54.4
  Top Layer w2: XF1.2 58,103 54.25,106.75 54.25,111.22 D1.1 62.82,112.32 66,115.5 C2.1 C1.1 87.2,115.5 89.3,117.6 94.94,117.6 U2.1
pads on no net: U1.6 U7.10
copper on no net:
  other v2: 37,31 97.5,31 97.5,124 37,124.5

## Polygon pours and split planes (outlines as drawn)
GND on Bottom Layer "NONET_L-01_P-001" (solid, remove dead copper, pour order 0): 34,69 69,69 70,68 70,54 73,51 101,51 101,127 34,127
HGND on Bottom Layer "NONET_L-01_P-001" (solid, remove dead copper, pour order 6): 34,64 66,64 66,51 72,45 72,28 34,28
3.3V on Top Layer "NONET_L-01_P-001" (solid, remove dead copper, pour order 1): 34,69 68,69 70,67 70,54 73,51 101,51 101,127 34,127
HGND on Top Layer "NONET_L-01_P-001" (solid, remove dead copper, pour order 5): 31,32
HGND on Top Layer "NONET_L-01_P-001" (solid, remove dead copper, pour order 4): 34,64 66,64 66,51 72,45 72,28 34,28
3.3V on Top Layer "NONET_L-01_P-001" (solid, remove dead copper, pour order 3): 34,65
3.3V on Top Layer "NONET_L-01_P-001" (solid, remove dead copper, pour order 2): 34,63

## Keep-outs
Keep-Out Layer:
  rectangle: 34,28 44.5,36.5

## Other copper
Top Layer:
  rectangle net GND: 92.3,113.7 95.8,115.8
  rectangle net GND: 81.3,102.5 90.4,104.8
  text "XFilament Controller 2020-0" at 74.5,44.5 h2
  text "1.5A @5V Microcontroller Filament Supply with Soft-Start" at 74.5,39 h2
  text "0-250VAC to 0-400VDC Grid Conrol Output" at 74.5,34 h2

## Silkscreen, mask and mechanical layers (free items; w line width, h text height)
Top Overlay:
  lines w0.2: 67,90.9 70.9,90.9 83.2,90.9 83.2,96.3 88.4,96.3
  text "GND" at 42,115 h2
  text "8-12V" at 42,112 h2
  text "3.3V" at 78.5,91 h2
  text "GND" at 36,79 h2
  text "RS232_RX" at 36,77 h2
  text "UART_TX" at 59.69,76.2 h2
  text "RS232_X" at 36,75.5 h2
  text "UART_RX" at 59.69,74.295 h2
  text "5V" at 36,74 h2
  text "Filament" at 92.5,65 h2
  text "GND" at 92.5,63.5 h2
  text "Earth" at 35,58.5 h2
  text "Grid Control" at 35,57 h2
  text "Grid HIGH" at 78.5,49.5 h2 r90
  text "Earth" at 35,35 h2
  text "0-250VAC In" at 35,33.5 h2
Board Outline:
  lines w0.2: 34.25,28.25 34.25,29.5 34.25,43.25 34.25,127 36.472,127 100.25,127 100.25,28.25 36.75,28.25 34.25,28.25

## Text inside footprints (layer, text, board x,y; h text height)
C1: Top Overlay "+" at 78.238,119.604 h1.5 r270
C2: Top Overlay "+" at 67.238,119.604 h1.5 r270
C7: Top Overlay "+" at 88.75,105.55 h1.5 r90
C26: Top Overlay "+" at 82.75,98.05 h1.5 r90